# Altium PCB PCB_Manilla.PcbDoc
Units mm, origin at the board's own origin, x right, y up, seen from the top; angles counter-clockwise.
Board outline 53.72 x 28.45 mm, 2 copper layers (Top Layer, Bottom Layer); 29 components, 19 nets, 89 pads, 0 vias.
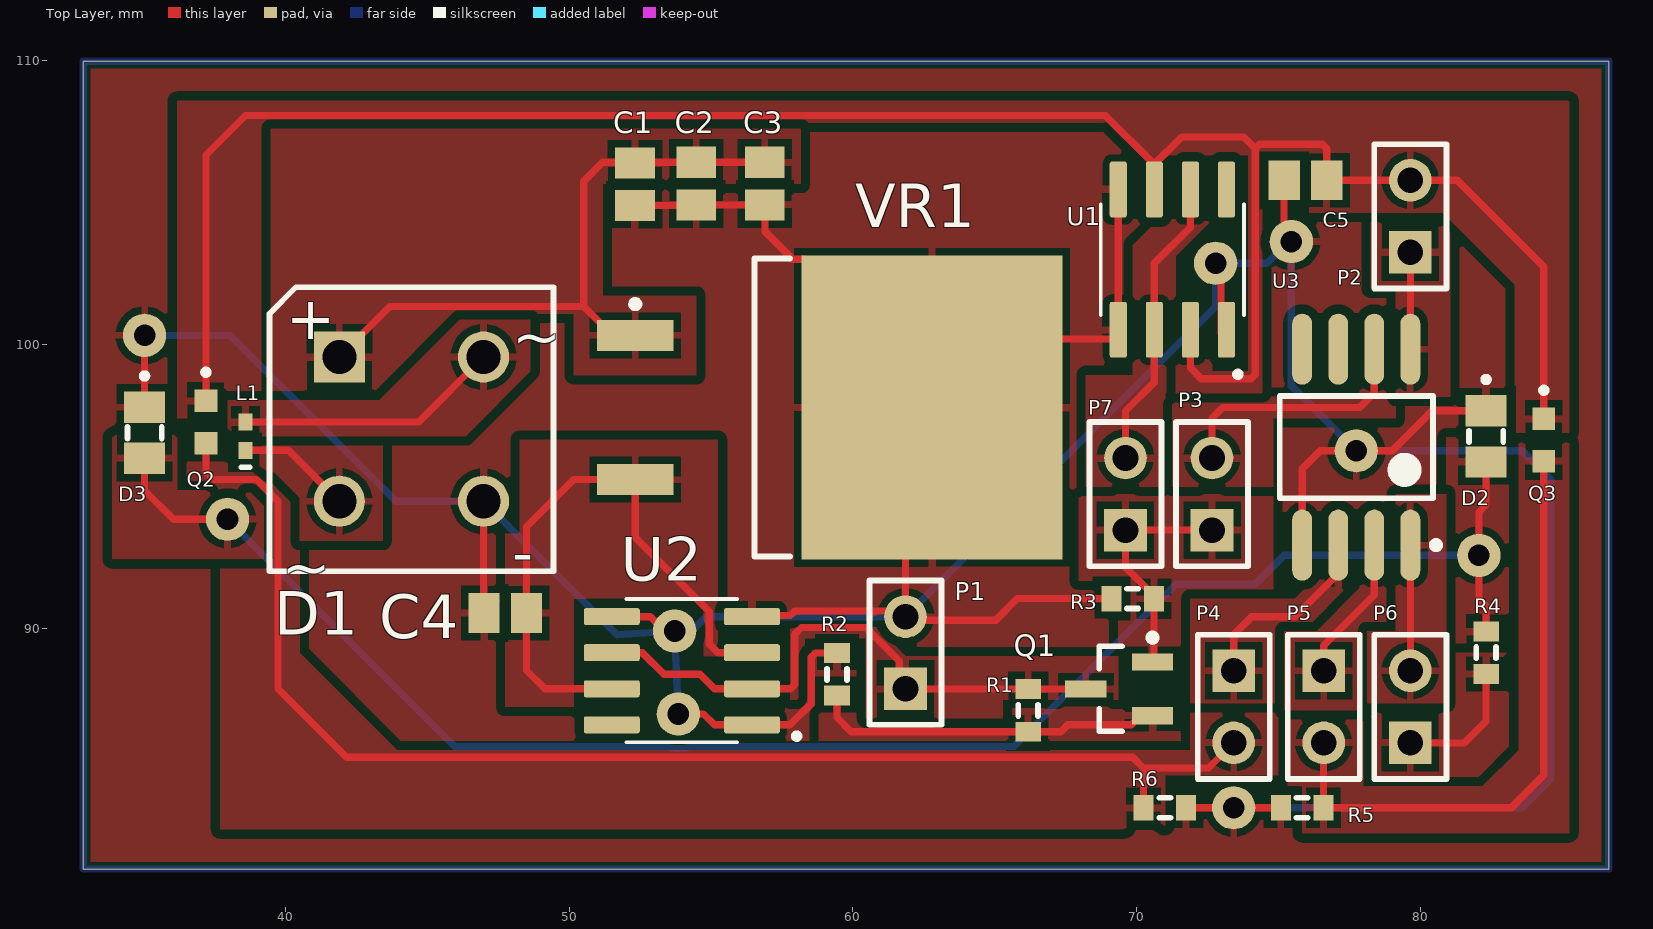
[diagram p0: Top Layer view]
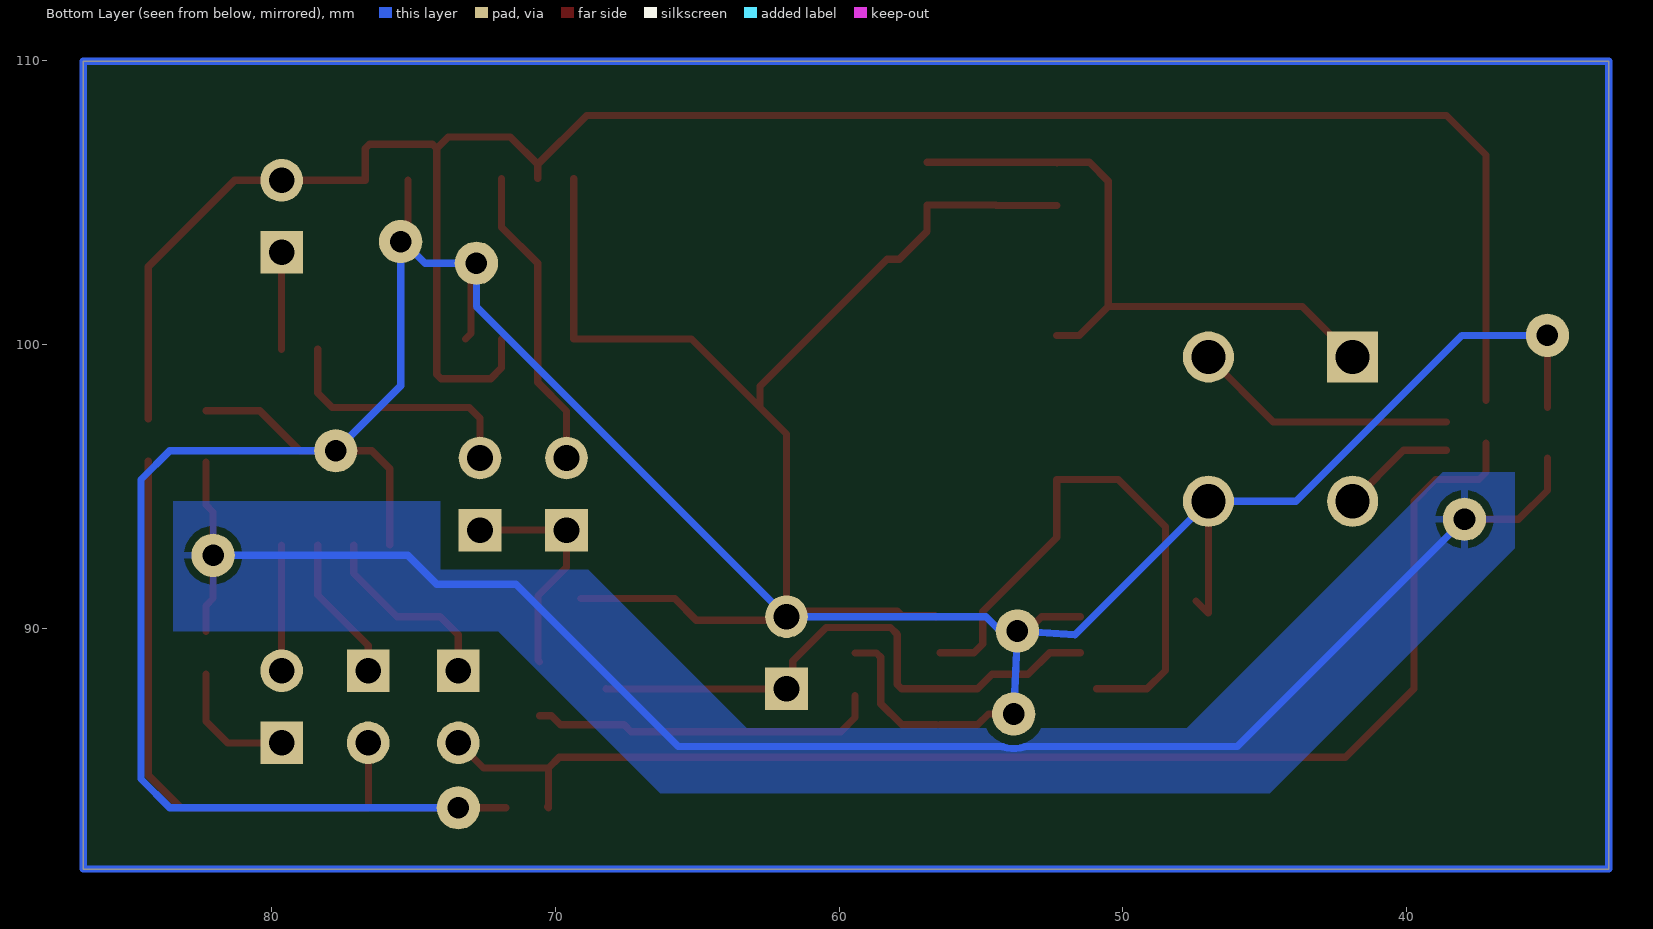
[diagram p1: Bottom Layer view, seen from below]

## Layer stack, top to bottom
Top Solder: solder mask 0.0102, Solder Resist, Dk 3.5
Top Layer: signal copper 0.0356
Dielectric 1: dielectric 0.32, FR-4, Dk 4.8
Bottom Layer: signal copper 0.0356
Bottom Solder: solder mask 0.0102, Solder Resist, Dk 3.5

## Board outline
32.893,81.534 32.893,109.982 86.614,109.982 86.614,81.534

## Design rules (kind name [scope] priority, off if disabled: settings)
Clearance [All] p1: gap=0.33 ignorepadtopadclearanceinfootprint=FALSE
HoleToHoleClearance [All] p1: gap=0.05 allowstackedmicrovias=TRUE
MinimumSolderMaskSliver [All] p1: minsoldermaskwidth=0.05
PolygonConnect [All] p1: connectstyle=Relief reliefconductorwidth=0.254 reliefentries=4 polygonreliefangle="90 Angle" airgapwidth=0.254
RoutingVias [All] p1: holewidth=0.711 width=1.27 viastyle="Through Hole" minholewidth=0.711 minwidth=1.27 maxholewidth=0.711 maxwidth=1.27
SilkToSilkClearance [All] p1: silktosilkclearance=0.05
SilkToSolderMaskClearance [IsPad] p1: minsilkscreentomaskgap=0.05 clearancetoexposedcopper=TRUE
SolderMaskExpansion [All] p1: expansion=0.102 istentingtop=FALSE
Width [All] p1: maxlimit=0.75 minlimit=0.254 preferedwidth=0.4
26 further rules are at their usual default settings.

## Classes and differential pairs
component class B4: D2 D3 Q2 Q3 R4 R5 R6
component class B3: C5 P2 P3 P4 P5 P6 U3
component class B2: P1 P7 Q1 R1 R2 R3 U1
component class B1: C1 C2 C3 C4 D1 L1 U2 VR1

## Components (designator, comment, footprint, x,y, rotation, side; value= is the part's Value field where it differs from the comment)
C1 "Cap Pol3" C0805 52.324,105.652 r270 top value=100pF
C2 "Cap Pol3" C0805 54.483,105.676 r270 top value=100pF
C3 "Cap Pol3" C0805 56.896,105.676 r270 top value=100pF
C4 "Cap Pol3" C0805 47.752,90.551 r180 top value=100pF
C5 "Cap Pol3" C0805 75.934,105.791 r180 top value=100pF
D1 "Bridge1" D-38 44.45,97.028 r0 top
D2 "597-3305-607F" LEDC2012X70N 82.296,96.774 r270 top
D3 "597-3305-607F" LEDC2012X70N 35.052,96.901 r270 top
L1 "Inductor" 0402-A 38.608,96.782 r90 top value=10mH
P1 "Header 2" HDR1X2 61.849,87.884 r90 top
P2 "Header 2" HDR1X2 79.629,103.251 r90 top
P3 "Header 2" HDR1X2 72.644,93.472 r90 top
P4 "Header 2" HDR1X2 73.406,88.519 r270 top
P5 "Header 2" HDR1X2 76.581,88.519 r270 top
P6 "Header 2" HDR1X2 79.629,85.979 r90 top
P7 "Header 2" HDR1X2 69.596,93.472 r90 top
Q1 "PNP" SOT-23B_M 69.374,87.884 r180 top
Q2 "PT19-21B/L41/TR8" XDCR_PT19-21B/L41/TR8 37.211,97.282 r270 top
Q3 "PT19-21B/L41/TR8" XDCR_PT19-21B/L41/TR8 84.328,96.647 r270 top
R1 "Res3" J1-0603 66.167,87.122 r270 top value=3.3K
R2 "Res3" J1-0603 59.436,88.392 r270 top value=33K
R3 "Res3" J1-0603 69.85,91.059 r0 top value=100K
R4 "Res3" J1-0603 82.296,89.154 r90 top value=100
R5 "Res3" J1-0603 75.819,83.693 r0 top value=100K
R6 "Res3" J1-0603 70.981,83.693 r180 top value=100K
U1 "TL081CD" SOIC127P599X175-8N#1 71.247,102.997 r90 top
U2 "TL081CD" SOIC127P599X175-8N#2 53.975,88.519 r180 top
U3 "ATtiny85-20SU" 8S2_M 77.724,96.393 r90 top
VR1 "Volt Reg" D2PAK_M 59.182,97.79 r0 top

## Footprints (in the part's own frame and the unit in brackets; to place one, negate y for a bottom-side part, rotate by r counter-clockwise, add the part's x,y. Pads: shape width x height; smd on the part's side, far side on the other; paste and mask are expansions set on the pad)
8S2_M [mm] "SOP, 8-Leads, Body 5.3x5.3mm, Pitch 1.27mm, IPC Low Density"
  oval 2.5x0.7 smd: 1(-3.45,-1.905) 2(-3.45,-0.635) 3(-3.45,0.635) 4(-3.45,1.905) 5(3.45,1.905) 6(3.45,0.635) 7(3.45,-0.635) 8(3.45,-1.905)
  silkscreen extent -3.57,-2.93 1.8,2.7, body extent -2.7,-2.68 2.7,2.68, height 2.16
0402-A [mm] "Chip Inductor, Body 1.0x0.5mm, IPC High Density"
  rect 0.6x0.5 smd: 1(-0.5,0) 2(0.5,0)
  silkscreen extent -1.1,-0.15 -1.1,0.15, body extent -0.55,-0.3 0.55,0.3, height 0.55
C0805 [mm] "Chip Capacitor, Body 2.0x1.3mm, IPC High Density"
  rect 1.1x1.4 smd: 1(-0.75,0) 2(0.75,0)
  body extent -1.1,-0.72 1.1,0.72, height 1.4
D2PAK_M [mm] "D2-PAK, 4-Leads, Body 8.8x10.4mm, Pitch 2.54mm, Lead Span 15.1mm, IPC Low Density"
  rect 2.7x1.1 smd: 1(-6.85,2.54) 3(-6.85,-2.54)
  rect 9.2x10.7 smd: 2(3.6,0)
  silkscreen extent -6.97,-5.25 -1.4,5.25, body extent -2.65,-5.28 6.35,5.28, height 4.69
D-38 [mm] "Bridge Rectifier; 4 Terminals; Body 9.4 x 9.4 mm (typ); Pitch 5.08 mm"
  rect 1.8x1.8 hole 1.2: 1(-2.54,2.54)
  round 1.8 hole 1.2: 2(-2.54,-2.54) 3(2.54,-2.54) 4(2.54,2.54)
  silkscreen extent -5,-5 5,5, body extent -5,-5 5,5, height 9.91
HDR1X2 [mm] "Connector; Header; 2 Position"
  rect 1.5x1.5 hole 0.9: 1(0,0)
  round 1.5 hole 0.9: 2(2.54,0)
  silkscreen extent -1.27,-1.27 3.81,1.27
J1-0603 [mm] "Chip Resistor, Body 1.6x0.8mm, IPC High Density"
  rect 0.7x0.9 smd: 1(-0.75,0) 2(0.75,0)
  silkscreen extent -0.2,-0.35 0.2,0.35, body extent -0.85,-0.48 0.85,0.48, height 0.9
LEDC2012X70N [mm]
  rect 1.1x1.45 smd: A(0.9,0) C(-0.9,0)
  silkscreen extent -2.1,-0.6 0.2,0.6, body extent -1,-0.63 1,0.63, height 0.7
SOIC127P599X175-8N#1 [mm]
  rrect25% 1.97x0.6 smd: 1(-2.47,-1.905) 2(-2.47,-0.635) 3(-2.47,0.635) 4(-2.47,1.905) 5(2.47,1.905) 6(2.47,0.635) 7(2.47,-0.635) 8(2.47,-1.905)
  silkscreen extent -4.14,-2.52 1.95,2.52, body extent -2.45,-3 2.45,3
SOIC127P599X175-8N#2 [mm]
  rrect25% 1.97x0.6 smd: 1(-2.47,1.905) 2(-2.47,0.635) 3(-2.47,-0.635) 4(-2.47,-1.905) 5(2.47,-1.905) 6(2.47,-0.635) 7(2.47,0.635) 8(2.47,1.905)
  silkscreen extent -4.14,-2.52 1.95,2.52, body extent -2.45,-3 2.45,3, height 1.75
SOT-23B_M [mm] "SOT23, 3-Leads, Body 2.9x1.3mm, Pitch 0.95mm, Lead Span 2.4mm, IPC Low Density"
  rect 1.45x0.6 smd: 1(-1.175,-0.95) 2(-1.175,0.95) 3(1.175,0)
  silkscreen extent -1.3,-1.92 0.7,1.5, body extent -0.7,-1.5 0.7,1.5, height 1.14
XDCR_PT19-21B/L41/TR8 [mm]
  rect 0.8x0.8 smd: C(-0.75,0) E(0.75,0)
  silkscreen extent -1.85,-0.1 -1.65,0.1

## Part data
C1 C2 C3 C4 C5: "Polarized Capacitor (Surface Mount)", LatestRevisionDate=29-May-2009, LatestRevisionNote="IPC-7351 Footprint Added.", PackageDescription="Chip Capacitor", PackageReference=C0805, Published=8-Jun-2000, Publisher="Altium Limited"
D1: "Full Wave Diode Bridge", DatasheetVersion=E2732B, LatestRevisionDate=29-May-2009, LatestRevisionNote="Sch pins A & K swapped.", PackageDescription="Bridge Rectifier; 4 Terminals; Body 9.4 x 9.4 mm (typ); Pitch 5.08 mm", PackageReference=D-38, Published=8-Jun-2000, Publisher="Altium Limited"
D2 D3: "LED Uni-Color Green 4-Pin Chip 0805 T/R", Package=None, Availability=Unavailable, MP=597-3305-607F, Price=None
P1 P2 P3 P4 P5 P6 P7: "Header, 2-Pin", LatestRevisionDate=17-Jul-2002, LatestRevisionNote="Re-released for DXP Platform.", Publisher="Altium Limited"
Q1: "PNP Bipolar Transistor", LatestRevisionDate=29-May-2009, LatestRevisionNote="IPC-7351 Footprint Added.", PackageDescription="3-Pin SOT-23 Package 0.95 mm Pitch, 2.4 mm Lead Span", PackageReference=SOT-23B, PackageVersion=Aug-1999, Published=8-Jun-2000, Publisher="Altium Limited"
Q2 Q3: "Phototransistors 940nm Top View 0603 (1608 Metric)", Package=None, Availability=Unavailable, MP=PT19-21B/L41/TR8, Price=None
R1 R2 R3 R4 R5 R6: "Resistor", LatestRevisionDate=29-May-2009, LatestRevisionNote="IPC-7351 Footprint Added.", PackageDescription="Chip Resistor", PackageReference=J1-0603, Published=8-Jun-2000, Publisher="Altium Limited"
U1 U2: "High Slew Rate JFET-Input Operational Amplifier 8-SOIC 0 to 70", Package="SOIC-8 Texas Instruments", Availability=Good, MF="Texas Instruments", MP=TL081CD, Price=None, Purchase-URL=https://pricing.snapeda.com/search/part/TL081CD/?ref=eda, SnapEDA_Link=https://www.snapeda.com/parts/TL081CD/Texas%20Instruments/view-part/4793911/?ref=snap
U3: library part CMP-0093-00173-2, "8-bit AVR Microcontroller, 20MHz, 2.7-5.5V, 8K Flash, 512 Bytes EEPROM, 512 Bytes SRAM, Industrial Grade (-40°C to 85°C), 8-Lead SOIC, Pb-Free", ComponentLink1Description="Manufacturer URL", ComponentLink1URL=http://www.atmel.com/, ComponentLink2Description="ATtiny25/45/85 Datasheet", ComponentLink2URL=http://www.atmel.com/dyn/resources/prod_documents/doc2586.pdf, ComponentLink3Description="ATtiny25/45/85 Summary", ComponentLink3URL=http://www.atmel.com/dyn/resources/prod_documents/2586S.pdf, DatasheetVersion="revN, Apr-2011", PackageDescription="8-Lead, 0.208\" Body, Plastic Small Outline Package (EIAJ)", PackageReference=8S2, PackageVersion="revF, Apr-2008", RevisionNote="DatasheetVersion updated. URLs added."
VR1: "Voltage Regulator", LatestRevisionDate=29-May-2009, LatestRevisionNote="IPC-7351 Footprint Added.", PackageDescription="3-Pin Transistor Outline Package 2.54 mm Pitch, 15.1 mm Lead Span", PackageReference=D2PAK, Published=24-Mar-1999, Publisher="Altium Limited"
L1: Code_IEC=1005, Code_JEITA=0402, LatestRevisionDate=29-May-2009, LatestRevisionNote="IPC-7351 Footprint Added.", PackageDescription="Chip Inductor", PackageReference=0402-A, Published=8-Jun-2000, Publisher="Altium Limited"

## Free pads (board coordinates)
  round 1.524 hole 0.762: 2(53.718,89.919) 3(53.848,86.995) 8(75.438,103.632) 9(72.771,102.87) 10(35.052,100.33) 11(77.724,96.266) 12(37.973,93.853) 13(82.042,92.583) 14(73.406,83.693)

## Nets (pads, with @x,y where several pads share a name; then routed paths per layer and width w, separated by ;. In a path a pad name is that pad's centre, name@x,y a point inside that pad or via, vN(x,y) a via of type N, cw(c..) or ccw(c..) an arc to the next point about the centre after c; other vN are vias at no path point)
GND: C1.2 C2.2 C3.2 C4.2 C5.2 D1.3 D2.C D3.C P1.2 pad.2 pad.3 pad.8 pad.9 pad.10 pad.11 pad.14 R2.1 R3.1 R5.1 R6.1 U1.1 U1.4 U1.5 U2.1 U2.4 U2.5 U3.4 VR1.2 | length 176.4
  Top Layer w0.254: D3.C pad.10 ; D1.3 46.99,90.563 C4.2 C4.2@47.425,90.974 ; U2.5 52.871,90.424 53.376,89.919 pad.2 pad.2@53.675,89.962 ; C1.2 54.459,104.902 C2.2 C3.2 56.896,103.995 57.878,103.013 58.309,103.013 62.782,98.54 VR1.2 ; pad.3@54.038,86.804 pad.3 54.737,86.995 55.118,86.614 U2.1 ; U2.1@56.577,86.614 57.783,86.614 58.529,87.36 58.529,88.993 58.678,89.142 R2.1 ; U2.4@56.577,90.424 56.617,90.464 57.783,90.464 57.946,90.627 61.646,90.627 P1.2 ; R3.1 65.786,91.059 65.024,90.297 61.976,90.297 P1.2 ; U1.5@69.342,105.853 69.342,100.203 65.195,100.203 VR1.2 ; R6.1 pad.14 R5.1 ; pad.9 72.962,102.679 72.962,100.393 U1.1@73.152,100.203 ; C5.2 75.184,104.23 75.438,103.976 pad.8 ; U3.4 75.819,95.631 76.454,96.266 pad.11 78.994,96.266 80.402,97.674 D2.C D2.C@82.285,97.663 ; P1.2 61.849,96.857 VR1.2
  Bottom Layer w0.254: pad.10 38.063,100.33 43.905,94.488 D1.3 51.689,89.789 pad.2 ; pad.3 pad.2 ; pad.14 83.566,83.693 84.582,84.709 84.582,95.25 83.566,96.266 pad.11 75.438,98.552 pad.8 75.346,103.632 74.584,102.87 pad.9 72.771,101.346 P1.2 54.827,90.424 54.192,89.789 pad.2
NetC1_1: C1.1 C2.1 C3.1 D1.1 VR1.1 | length 22.7
  Top Layer w0.254: D1.1 43.688,101.346 50.516,101.346 ; VR1.1 51.532,100.33 50.516,101.346 ; C3.1 C2.1 52.348,106.426 C1.1 52.3,106.426 51.181,106.426 50.516,105.761 50.516,101.346
NetC4_1: C4.1 U2.3 U2.7 VR1.3 | length 20.8
  Top Layer w0.254: U2.7@50.927,87.884 49.149,87.884 48.502,88.531 C4.1 48.502,93.587 50.165,95.25 VR1.3 52.332,93.21 54.937,90.605 54.937,89.462 55.245,89.154 U2.3
NetC5_1: C5.1 P2.2 Q2.C Q3.C U1.2 U1.6 | length 77.5
  Top Layer w0.254: Q2.C 37.211,106.68 38.608,108.077 68.888,108.077 U1.6@70.612,106.353 ; U1.6@70.612,105.853 U1.6@70.612,106.353 ; U1.2@71.882,100.203 71.882,99.187 72.263,98.806 74.019,98.806 74.168,98.955 74.168,106.912 ; Q3.C 84.328,102.743 81.28,105.791 P2.2 C5.1 76.684,106.912 76.535,107.061 74.317,107.061 74.168,106.912 ; U1.6@70.612,106.353 71.574,107.315 73.765,107.315 74.168,106.912
NetD1_2: D1.2 L1.1 | length 4
  Top Layer w0.254: L1.1 40.116,96.282 D1.2
NetD1_4: D1.4 L1.2 | length 9.3
  Top Layer w0.254: L1.2 44.704,97.282 D1.4
NetD2_A: D2.A D3.A pad.12 pad.13 R4.2 | length 60.8
  Top Layer w0.254: D3.A 35.052,94.869 36.068,93.853 pad.12 ; R4.2 82.296,90.805 82.042,91.059 82.042,94.107 82.296,94.361 D2.A
  Bottom Layer w0.254: pad.12 45.974,85.852 53.381,85.852 cw(c53.381,85.598) 53.462,85.839 ccw(c53.848,86.995) 54.232,85.838 54.236,85.839 cw(c54.315,85.598) 54.315,85.852 65.659,85.852 71.374,91.567 74.168,91.567 75.184,92.583 pad.13
NetP1_1: P1.1 Q1.3 R1.1 U2.2 U2.6 | length 20.5
  Top Layer w0.254: U2.6 52.578,89.154 53.34,88.392 54.61,88.392 55.118,87.884 U2.2 57.796,87.884 57.945,88.033 57.945,89.8 58.188,90.043 60.452,90.043 61.629,88.866 61.629,88.104 61.861,87.872 R1.1 66.173,87.878 68.193,87.878 Q1.3
NetP2_1: P2.1 U3.8 | length 3.4
  Top Layer w0.254: U3.8 P2.1
NetP3_1: P3.1 P7.1 Q1.1 R3.2 | length 8.1
  Top Layer w0.254: Q1.1 70.6,88.885 R3.2 70.6,91.159 69.596,92.163 P7.1 P3.1
NetP3_2: P3.2 U3.7 | length 9
  Top Layer w0.254: P3.2 72.644,97.409 73.025,97.79 77.851,97.79 78.359,98.298 U3.7
NetP4_1: P4.1 U3.3 | length 6.8
  Top Layer w0.254: P4.1 73.406,89.789 74.041,90.424 75.565,90.424 77.089,91.948 U3.3
NetP4_2: P4.2 Q2.E R6.2 | length 47.2
  Top Layer w0.254: Q2.E 37.211,95.504 37.465,95.25 38.989,95.25 39.751,94.488 39.751,87.884 42.164,85.471 69.85,85.471 70.231,85.09 ; R6.2@70.266,83.728 R6.2 70.231,85.09 ; P4.2 72.517,85.09 70.231,85.09
NetP5_1: P5.1 U3.2 | length 5.2
  Top Layer w0.254: P5.1 76.581,89.408 78.359,91.186 U3.2
NetP5_2: P5.2 Q3.E R5.2 | length 21.6
  Top Layer w0.254: P5.2 76.575,85.973 76.575,83.699 R5.2 83.185,83.693 84.328,84.836 Q3.E
NetP6_1: P6.1 R4.1 | length 5
  Top Layer w0.254: P6.1@79.883,86.233 P6.1 81.534,85.979 82.296,86.741 R4.1
NetP6_2: P6.2 U3.1 | length 4.4
  Top Layer w0.254: P6.2 U3.1
NetP7_2: P7.2 U1.3 U1.7 | length 10.8
  Top Layer w0.254: P7.2 69.596,97.663 70.612,98.679 70.612,100.203 70.612,102.87 71.882,104.14 U1.7@71.882,105.853
NetQ1_2: Q1.2 R1.2 R2.2 | length 12.3
  Top Layer w0.254: R2.2 59.436,86.868 59.932,86.372 R1.2 67.322,86.372 67.564,86.614 69.804,86.614 70.124,86.934 Q1.2
pads on no net: U1.8 U2.8 U3.5 U3.6
copper on no net: | length 164.3
  Bottom Layer w0.254: 32.893,81.534 86.614,81.534 86.614,109.982 32.893,109.982 32.893,81.534

## Polygon pours and split planes (outlines as drawn)
GND on Top Layer "GND_L01_P032" (solid, pour order 32): 86.36,109.728 33.147,109.728 33.147,81.788 86.36,81.788
NetC4_1 on Top Layer "NETC4_1_L01_P030" (solid, pour order 30): 50.165,87.249 47.752,87.249 47.752,93.345 48.26,93.345 48.26,96.647 55.245,96.647 55.245,89.789 55.245,89.027 54.737,89.027 54.737,91.059 53.721,91.059 50.165,91.059 50.165,88.519
NetC5_1 on Top Layer "NETC5_1_L01_P006" (solid, pour order 6): 37.973,97.409 36.195,97.409 36.195,108.585 85.217,108.585 85.217,96.901 83.312,96.901 83.312,102.108 80.772,104.648 76.073,104.648 76.073,106.812 74.417,106.812 74.417,98.303 74.422,98.298 71.374,98.298 71.374,101.6 72.644,101.6 72.644,99.06 73.914,99.06 73.914,106.68 71.12,106.68 70.993,106.553 70.993,106.353 70.231,106.353 70.231,106.553 68.961,107.823 39.37,107.823 39.37,98.044 37.973,98.044
NetQ1_2 on Top Layer "NETQ1_2_L01_P026" (solid, pour order 26): 71.882,85.725 71.882,87.757 69.342,87.757 69.342,87.503 65.278,87.503 65.278,86.614 60.452,86.614 60.452,88.392 58.801,88.392 58.801,85.725
NetP4_2 on Top Layer "NETP4_2_L01_P025" (solid, pour order 25): 36.195,97.409 37.973,97.409 37.973,95.504 39.624,95.504 40.513,94.615 40.513,89.154 43.942,85.725 71.882,85.725 71.882,87.249 75.076,87.249 75.076,84.855 75.057,84.836 70.993,84.836 70.993,82.931 37.719,82.931 37.719,92.456 39.243,92.456 39.243,94.361 38.735,94.869 36.195,94.869
NetD2_A on Top Layer "NETD2_A_L01_P024" (solid, pour order 24): 33.909,97.028 33.909,92.456 39.243,92.456 39.243,94.361 38.735,94.869 36.195,94.869 36.195,97.028
NetD2_A on Top Layer "NETD2_A_L01_P023" (solid, pour order 23): 83.566,89.154 83.566,96.739 80.899,96.739 80.899,89.154
NetP6_1 on Top Layer "NETP6_1_L01_P021" (solid, pour order 21): 78.105,84.582 82.296,84.582 83.439,85.725 83.439,89.154 81.153,89.154 81.153,87.376 78.105,87.376
NetP5_2 on Top Layer "NETP5_2_L01_P020" (solid, pour order 20): 77.978,87.122 77.978,82.804 75.819,82.804 75.819,84.455 75.311,84.455 75.311,87.122
NetP5_2 on Top Layer "NETP5_2_L01_P019" (solid, pour order 19): 75.819,82.804 85.217,82.804 85.217,96.774 83.439,96.774 83.439,85.725 82.169,84.455 75.819,84.455
NetP3_1 on Top Layer "NETP3_1_L01_P018" (solid, pour order 18): 74.803,91.186 74.803,94.742 67.945,94.742 67.945,91.694 69.596,91.694 69.596,90.424 69.342,90.424 69.342,87.884 71.755,87.884 71.755,91.186
NetP1_1 on Top Layer "NETP1_1_L01_P017" (solid, pour order 17): 57.785,90.043 60.833,90.043 61.849,89.027 69.342,89.027 69.342,87.503 65.278,87.503 65.278,86.614 60.452,86.614 60.452,89.662 58.293,89.662 58.293,87.503 57.785,87.503
NetC1_1 on Top Layer "NETC1_1_L01_P005" (solid, pour order 5): 39.497,98.171 43.18,98.171 46.101,101.092 50.165,101.092 50.165,98.933 54.483,98.933 54.483,101.727 51.181,101.727 51.181,105.664 58.166,105.664 58.166,107.696 39.497,107.696
NetP7_2 on Top Layer "NETP7_2_L01_P015" (solid, pour order 15): 70.993,94.996 70.993,98.298 71.374,98.298 71.374,103.124 72.644,104.394 72.644,106.045 71.12,106.045 71.12,104.775 69.85,103.505 69.85,98.933 68.199,98.933 68.199,94.996
NetP4_1 on Top Layer "NETP4_1_L01_P012" (solid, pour order 12): 77.851,94.742 77.851,91.44 76.454,90.043 75.184,90.043 75.184,87.376 71.882,87.376 71.882,91.059 75.565,91.059 76.454,91.948 76.454,94.742
NetP5_1 on Top Layer "NETP5_1_L01_P011" (solid, pour order 11): 79.121,94.742 79.121,89.916 78.105,88.9 78.105,87.122 75.184,87.122 75.184,89.916 76.327,89.916 77.851,91.44 77.851,94.742
NetP6_2 on Top Layer "NETP6_2_L01_P010" (solid, pour order 10): 80.899,87.376 80.899,94.742 79.121,94.742 79.121,89.916 78.105,89.916 78.105,87.376
NetP3_2 on Top Layer "NETP3_2_L01_P008" (solid, pour order 8): 79.121,101.854 77.851,101.854 77.851,98.171 71.374,98.171 71.247,98.044 71.247,94.996 74.803,94.996 74.803,97.409 79.121,97.409
NetP2_1 on Top Layer "NETP2_1_L01_P007" (solid, pour order 7): 81.026,104.648 78.232,104.648 78.232,101.981 79.121,101.981 79.121,98.171 81.026,98.171
NetD1_2 on Top Layer "NETD1_2_L01_P004" (solid, pour order 4): 37.973,95.504 39.624,95.504 40.513,94.615 40.513,93.091 43.434,93.091 43.434,96.774 37.973,96.774
NetD1_4 on Top Layer "NETD1_4_L01_P002" (solid, pour order 2): 37.973,96.774 46.355,96.774 48.641,99.06 48.641,100.965 46.228,100.965 43.307,98.044 37.973,98.044
NetD2_A on Bottom Layer "NETD2_A_L02_P028" (solid, pour order 28): 83.439,94.488 74.041,94.488 74.041,92.075 68.834,92.075 63.246,86.487 47.752,86.487 38.735,95.504 36.195,95.504 36.195,92.837 44.831,84.201 66.294,84.201 72.009,89.916 83.439,89.916

## Text inside footprints (layer, text, board x,y; h text height)
D1: Top Overlay "~" at 48.006,99.568 h1.5; Top Overlay "~" at 39.878,91.44 h1.5; Top Overlay "-" at 48.006,91.948 h1.5; Top Overlay "+" at 40.04,100.192 h1.5